# Altium PCB stm32PCB1.PcbDoc
Units mm, origin at the board's own origin, x right, y up, seen from the top; angles counter-clockwise.
Board outline 41.1 x 36.5 mm, 4 copper layers (Top Layer, Int1 (GND), Int2 (PWR), Bottom Layer), stack 1.57 mm thick; 35 components, 27 nets, 168 pads, 29 vias.
Unrouted connection lines stored in the file: 93.
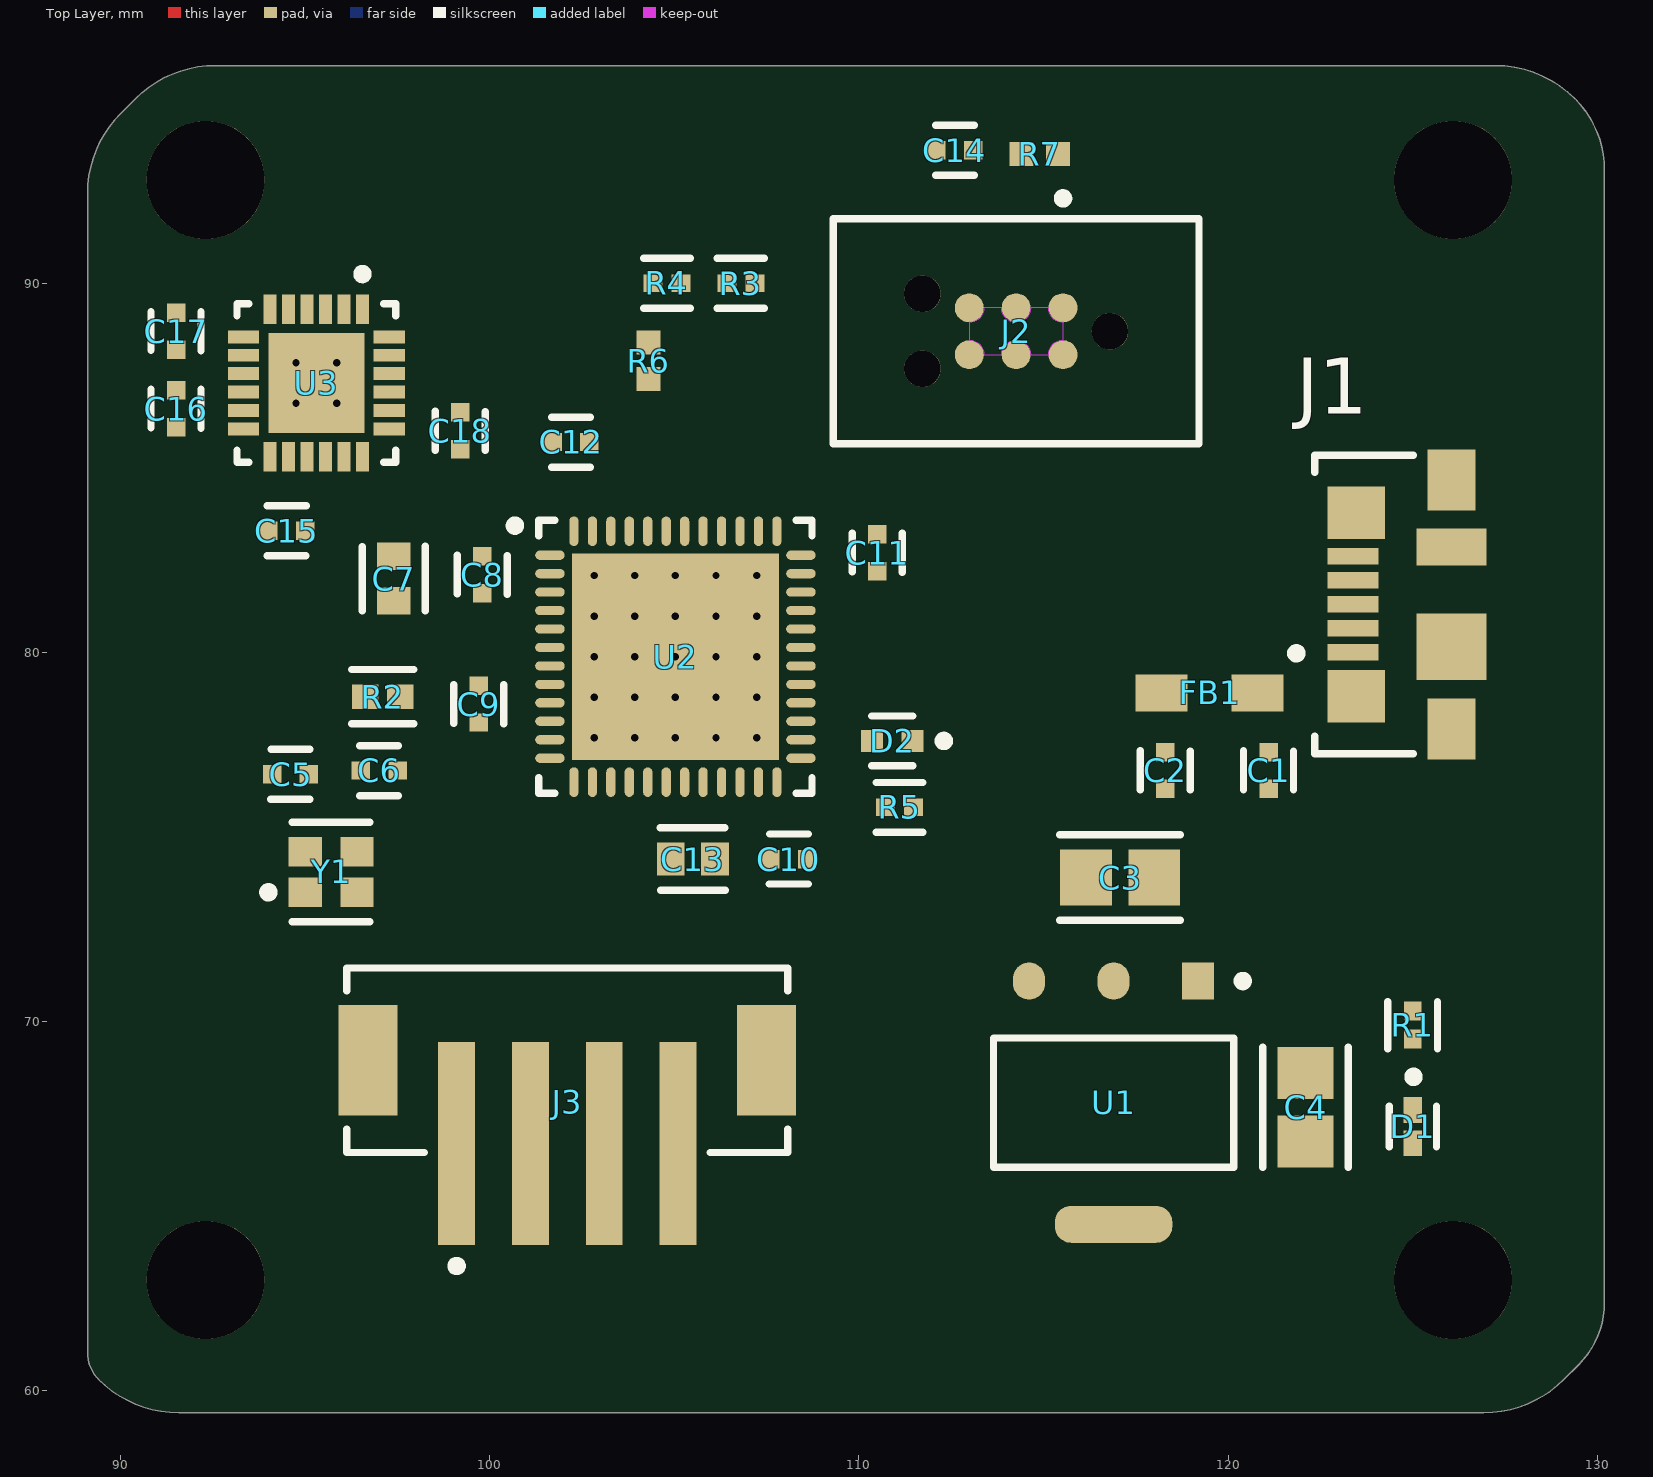
[diagram p0: Top Layer view]
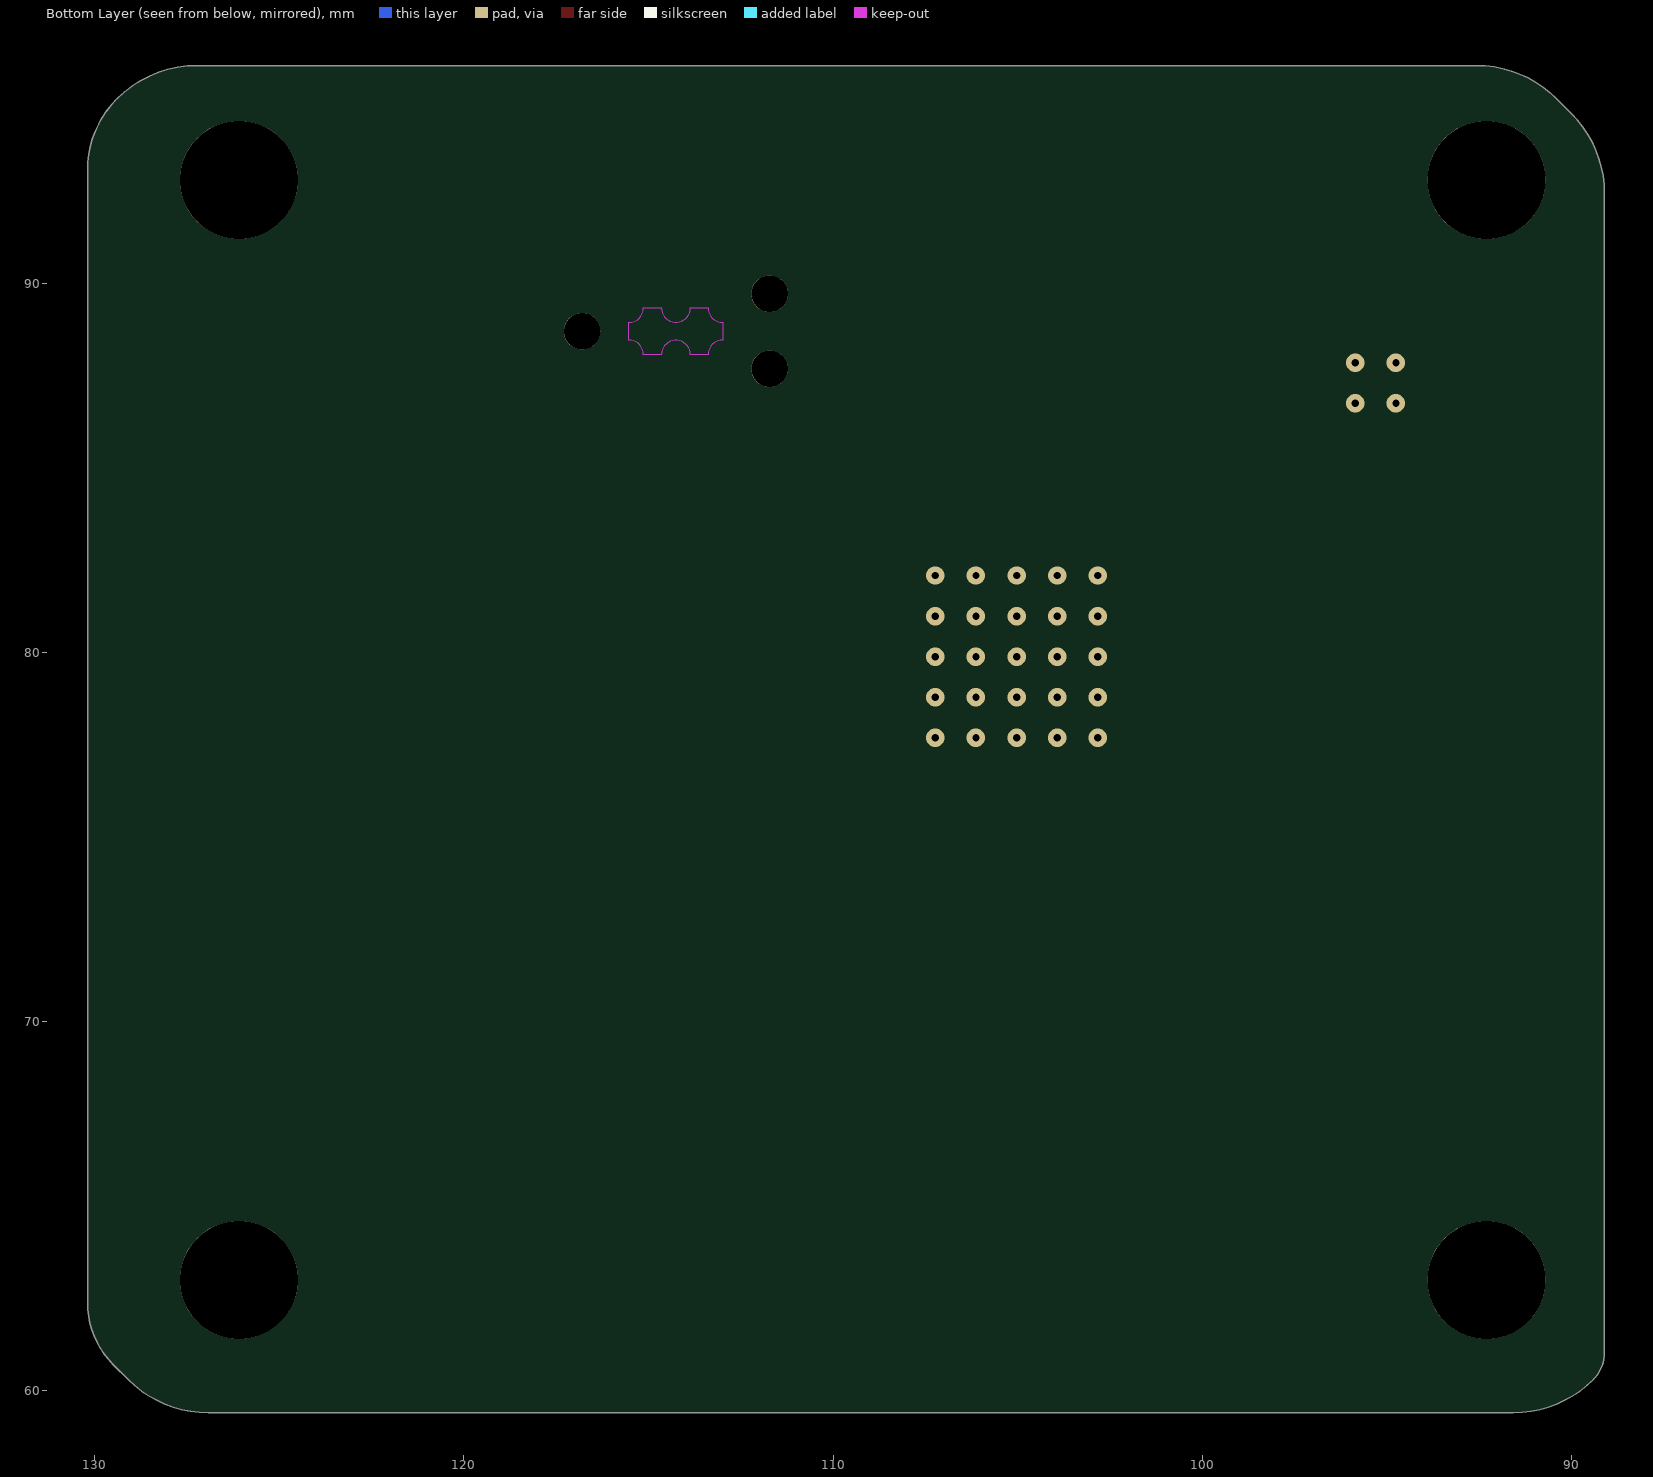
[diagram p1: Bottom Layer view, seen from below]

## Layer stack, top to bottom
Top Solder: solder mask 0.0254, SM-001, Dk 4
Top Layer: signal copper 0.035
Dielectric 1: prepreg 0.2, PP-017, Dk 4.6
Int1 (GND): signal copper 0.0175
Dielectric 3: core 1.065, Core-039, Dk 4.6
Int2 (PWR): signal copper 0.0175
Dielectric 5: prepreg 0.2, PP-017, Dk 4.6
Bottom Layer: signal copper 0.035
Bottom Solder: solder mask 0.0254, SM-001, Dk 4

## Board outline
89.1,61.027 89.1,92.43 cw(c92.166,92.43) 89.998,94.598 90.402,95.002 cw(c92.57,92.834) 92.57,95.9 127.23,95.9 cw(c127.23,92.834) 129.398,95.002 cw(c127.462,93.066) 130.2,93.066 130.2,62.39 cw(c127.81,62.39) 129.5,60.7 129.098,60.298 cw(c126.93,62.466) 126.93,59.4 91.57,59.4 cw(c91.57,62.466) 89.402,60.298 cw(c90.131,61.027)

## Design rules (kind name [scope] priority, off if disabled: settings)
Clearance [All] p1: gap=0.2 ignorepadtopadclearanceinfootprint=FALSE
DiffPairsRouting [All] p1: maxlimit=0.254 minlimit=0.254 mostfreqgap=0.254 toplayer_minwidth=0.381 toplayer_maxwidth=0.381 toplayer_prefwidth=0.381 midlayer1_minwidth=0.381 midlayer1_maxwidth=0.381 midlayer1_prefwidth=0.381 midlayer2_minwidth=0.381 midlayer2_maxwidth=0.381 midlayer2_prefwidth=0.381 bottomlayer_minwidth=0.381 bottomlayer_maxwidth=0.381 bottomlayer_prefwidth=0.381 maxuncoupledlength=12.7
PolygonConnect [All] p1: connectstyle=Direct reliefconductorwidth=0.254 reliefentries=4 polygonreliefangle="90 Angle" airgapwidth=0.254
RoutingVias [All] p1: holewidth=0.711 width=1.27 viastyle="Through Hole" minholewidth=0.711 minwidth=1.27 maxholewidth=0.711 maxwidth=1.27
SolderMaskExpansion [All] p1: expansion=0 istentingtop=FALSE
SupplyNets "Schematic Supply Nets_3" [InNet('VBUS')] p1: voltage=0.000
SupplyNets "Schematic Supply Nets_2" [InNet('+3V3')] p2: voltage=0.000
SupplyNets "Schematic Supply Nets_1" [InNet('GND')] p3: voltage=0.000
SupplyNets "Schematic Supply Nets" [InNet('+5')] p4: voltage=0.000
UnRoutedNet [All] p1: checkbadconnections=TRUE
Width [All] p1: maxlimit=1 minlimit=0.2 preferedwidth=0.254 midlayer1_minwidth=0.254 midlayer1_maxwidth=0.254 midlayer2_minwidth=0.254 midlayer2_maxwidth=0.254 minimp=50.000000 maximp=50.000000 favimp=50.000000
28 further rules are at their usual default settings.

## Classes and differential pairs
differential pair class DIFF_USB: USB_D
differential pair USB_D: +USB_D_P -USB_D_N

## Components (designator, comment, footprint, x,y, rotation, side; value= is the part's Value field where it differs from the comment)
C1 "2u2" FP-CC0402-MFG 121.1,76.8 r270 top value="1 uF"
C2 "2u2" FP-CC0402-MFG 118.3,76.8 r270 top value="1 uF"
C3 "22u" FP-GRM21B-0_15-IPC_A 117.074,73.9 r0 top
C4 "22u" FP-GRM21B-0_15-IPC_A 122.1,67.674 r90 top
C5 "100n" FP-CC0402-MFG 94.6,76.7 r0 top value="1 uF"
C6 "100n" FP-CC0402-MFG 97,76.8 r0 top value="1 uF"
C7 "2.2uF" FP-C0603C-CF-MFG 97.4,82 r270 top value="0.10 μF"
C8 "100n" FP-CC0402-MFG 99.8,82.1 r270 top value="1 uF"
C9 "100n" FP-CC0402-MFG 99.7,78.6 r90 top value="1 uF"
C10 "100n" FP-CC0402-MFG 108.1,74.4 r180 top value="1 uF"
C11 "100n" FP-CC0402-MFG 110.5,82.7 r270 top value="1 uF"
C12 "100n" FP-CC0402-MFG 102.2,85.7 r0 top value="1 uF"
C13 "2.2uF" FP-C0603C-CF-MFG 105.5,74.4 r180 top value="0.10 μF"
C14 "100n" FP-CC0402-MFG 112.6,93.6 r180 top value="1 uF"
C15 "100n" FP-CC0402-MFG 94.5,83.3 r0 top value="1 uF"
C16 "100n" FP-CC0402-MFG 91.5,86.6 r270 top value="1 uF"
C17 "10n" FP-CC0402-MFG 91.5,88.7 r270 top value="1 uF"
C18 "2n2" FP-CC0402-MFG 99.2,86 r270 top value="1 uF"
D1 "LED" FP-APHHS1005CGCK-MFG 125,67.15 r270 top
D2 "Led_red" FP-5988A10107F-MFG 110.9,77.6 r180 top
FB1 "120R" WE-CBA_0805_L2W1.2H0.9_HC 119.5,78.9 r180 top
J1 "473460001" FP-473460001-MFG 125.7,81.3 r90 top
J2 "TC2030-CTX-NL" FP-TC2030-CTX-NL-MFG 114.26,88.7 r180 top
J3 "B4B-PH-SM4-GW-TB(LF)(SN)" FP-B4B-PH-SM4-GW-TB_LF_S-MFG 102.1,68.95 r0 top
R1 "1k" FP-CR0402-IPC_C 125,69.9 r270 top
R2 "0R" FP-CR0402-IPC_A 97.1,78.8 r0 top
R3 "2k2" FP-CR0402-IPC_C 106.8,90 r0 top
R4 "2k2" FP-CR0402-IPC_C 104.8,90 r180 top
R5 "1k" FP-CR0402-IPC_C 111.1,75.8 r0 top
R6 "10k" RESC1005X37X20ML05T10 104.3,87.9 r270 top
R7 "10k" RESC1005X37X20ML05T10 114.9,93.5 r0 top
U1 "AMS1117-3.3" FP-AMS1117-IPC_C 116.9,67.8 r270 top
U2 "STM32F411CEU6" STM-UFQFPN48_L 105.029,79.883 r0 top
U3 "MPU-6050" IS-QFN-24_V 95.3,87.3 r270 top
Y1 "25MHz" FP-ABM11AIG-MFG 95.7,74.05 r0 top

## Footprints (in the part's own frame and the unit in brackets; to place one, negate y for a bottom-side part, rotate by r counter-clockwise, add the part's x,y. Pads: shape width x height; smd on the part's side, far side on the other; paste and mask are expansions set on the pad)
FP-5988A10107F-MFG [mm]
  rect 0.6x0.6 smd paste+0 mask+0: 1(-0.55,0) 2(0.55,0)
  silkscreen extent -1.53,-0.67 0.56,0.67, body extent -0.95,-0.42 0.95,0.42, height 0.25
FP-473460001-MFG [mm]
  rect 0.45x1.38 smd paste+0 mask+0: 1(-1.3,2.31) 2(-0.65,2.31) 3(0,2.31) 4(0.65,2.31) 5(1.3,2.31)
  rect 1.425x1.55 smd paste+0 mask+0: 6(-2.488,2.225) 7(2.488,2.225)
  rect 1.65x1.3 smd paste+0 mask+0: 8(-3.375,-0.35) 11(3.375,-0.35)
  rect 1.8x1.9 smd paste+0 mask+0: 9(-1.15,-0.35)
  rect 1x1.9 smd paste+0 mask+0: 10(1.55,-0.35)
  silkscreen extent -4.05,0.67 4.05,3.97, body extent -4.3,-2.48 4.3,3.45, height 0.25
FP-ABM11AIG-MFG [mm]
  rect 0.9x0.8 smd paste+0 mask+0: 1(-0.7,-0.55) 2(0.7,-0.55) 3(0.7,0.55) 4(-0.7,0.55)
  silkscreen extent -1.82,-1.35 1.05,1.35, body extent -1.25,-1.05 1.25,1.05, height 0.25
FP-AMS1117-IPC_C [mm]
  rect 1.004x0.872 smd paste+0 mask+0: 1(-3.295,2.29)
  rrect100% 1.004x0.872 smd paste+0 mask+0: 2(-3.295,0) 3(-3.295,-2.29)
  rrect87% 1.004x3.182 smd paste+0 mask+0: 4(3.295,0)
  silkscreen extent -3.42,-3.25 1.75,3.63, body extent -3.9,-3.35 3.9,3.35, height 0.25
FP-APHHS1005CGCK-MFG [mm]
  rect 0.7x0.5 smd paste+0 mask+0: 1(-0.45,0) 2(0.45,0)
  silkscreen extent -1.47,-0.63 0.55,0.65, body extent -0.9,-0.4 0.9,0.4, height 0.25
FP-B4B-PH-SM4-GW-TB_LF_S-MFG [mm]
  rect 1x5.5 smd paste+0 mask+0: 1(-3,-2.25) 2(-1,-2.25) 3(1,-2.25) 4(3,-2.25)
  rect 1.6x3 smd paste+0 mask+0: 5(-5.4,0) 6(5.4,0)
  silkscreen extent -5.97,-5.7 5.97,2.5, body extent -6.3,-5.1 6.3,2.6, height 0.25
FP-C0603C-CF-MFG [mm]
  rect 0.75x0.9 smd paste+0 mask+0: 1(-0.6,0) 2(0.6,0)
  silkscreen extent -0.87,-0.85 0.88,0.85, body extent -1.2,-0.6 1.2,0.6, height 0.25
FP-CC0402-MFG [mm]
  rect 0.5x0.5 smd paste+0 mask+0: 1(-0.5,0) 2(0.5,0)
  silkscreen extent -0.53,-0.68 0.53,0.67, body extent -0.87,-0.48 0.87,0.48, height 0.25
FP-CR0402-IPC_A [mm]
  rect 0.715x0.672 smd paste+0 mask+0: 1(-0.479,0) 2(0.479,0)
  silkscreen extent -0.84,-0.74 0.84,0.74, body extent -1.04,-0.54 1.04,0.54, height 0.25
FP-CR0402-IPC_C [mm]
  rect 0.515x0.472 smd paste+0 mask+0: 1(-0.379,0) 2(0.379,0)
  silkscreen extent -0.64,-0.67 0.64,0.67, body extent -0.74,-0.38 0.74,0.38, height 0.25
FP-GRM21B-0_15-IPC_A [mm]
  rect 1.406x1.508 smd paste+0 mask+0: 1(-0.926,0) 2(0.926,0)
  silkscreen extent -1.63,-1.15 1.63,1.15, body extent -2.13,-1.25 2.13,1.25, height 0.25
FP-TC2030-CTX-NL-MFG [mil]
  round 30.98 smd paste-39370.1 mask+0: 1(-50,-25) 2(-50,25) 3(0,-25) 4(0,25) 5(50,-25) 6(50,25)
  round 39.02 hole 39.02 unplated paste-99999 mask+0: ""(-100,0) ""(100,-40) ""(100,40)
  Keep-Out Layer region: -34.51,-25 -15.49,-25 -13.96,-18.28 -9.66,-12.89 -3.45,-9.9 3.45,-9.9 9.66,-12.89 13.96,-18.28 15.49,-25 15.49,-25 34.51,-25 35.69,-19.07 39.05,-14.05 44.07,-10.69 50,-9.51 50,-9.51 50,9.51 44.07,10.69 39.05,14.05 35.69,19.07 34.51,25 34.51,25 15.49,25 13.96,18.28 9.66,12.89 3.45,9.9 -3.45,9.9 -9.66,12.89 -13.96,18.28 -15.49,25 -15.49,25 -34.51,25 -35.69,19.07 -39.05,14.05 -44.07,10.69 -50,9.51 -50,9.51 -50,-9.51 -44.07,-10.69 -39.05,-14.05 -35.69,-19.07 -34.51,-25
  silkscreen extent -195,-147 195,120, body extent -199,-152 199,124, height 59
IS-QFN-24_V [mm] "QFN, 24-Leads, Body 4x4mm, Pitch 0.5mm, Thermal Pad 2.7x2.6mm"
  rect 0.8x0.35 smd: 1(-2,1.25) 2(-2,0.75) 3(-2,0.25) 4(-2,-0.25) 5(-2,-0.75) 6(-2,-1.25) 13(2,-1.25) 14(2,-0.75) 15(2,-0.25) 16(2,0.25) 17(2,0.75) 18(2,1.25)
  rect 0.35x0.85 smd mask+0.102: 7(-1.25,-1.975) 8(-0.75,-1.975) 9(-0.25,-1.975) 10(0.25,-1.975) 11(0.75,-1.975) 12(1.25,-1.975) 19(1.25,1.975) 20(0.75,1.975) 21(0.25,1.975) 22(-0.25,1.975) 23(-0.75,1.975) 24(-1.25,1.975)
  rect 2.7x2.6 smd: 25(0,0)
  silkscreen extent -3.07,-2.15 2.15,2.15, body extent -2,-2 2,2, height 0.95
RESC1005X37X20ML05T10 [mm] "Chip Resistor, 2-Leads, Body 1.00x0.50mm, IPC Low Density"
  rect 0.65x0.65 smd: 1(-0.5,0) 2(0.5,0)
  body extent -0.53,-0.27 0.53,0.28, height 0.37
STM-UFQFPN48_L [mm] "QFN, 48-Leads, Body 7.1x7.1mm, Pitch 0.5mm, Thermal Pad 5.6x5.6mm, IPC High Density"
  oval 0.8x0.25 smd: 1(-3.4,2.75) 2(-3.4,2.25) 3(-3.4,1.75) 4(-3.4,1.25) 5(-3.4,0.75) 6(-3.4,0.25) 7(-3.4,-0.25) 8(-3.4,-0.75) 9(-3.4,-1.25) 10(-3.4,-1.75) 11(-3.4,-2.25) 12(-3.4,-2.75) 25(3.4,-2.75) 26(3.4,-2.25) 27(3.4,-1.75) 28(3.4,-1.25) 29(3.4,-0.75) 30(3.4,-0.25) 31(3.4,0.25) 32(3.4,0.75) 33(3.4,1.25) 34(3.4,1.75) 35(3.4,2.25) 36(3.4,2.75)
  oval 0.25x0.8 smd: 13(-2.75,-3.4) 14(-2.25,-3.4) 15(-1.75,-3.4) 16(-1.25,-3.4) 17(-0.75,-3.4) 18(-0.25,-3.4) 19(0.25,-3.4) 20(0.75,-3.4) 21(1.25,-3.4) 22(1.75,-3.4) 23(2.25,-3.4) 24(2.75,-3.4) 37(2.75,3.4) 38(2.25,3.4) 39(1.75,3.4) 40(1.25,3.4) 41(0.75,3.4) 42(0.25,3.4) 43(-0.25,3.4) 44(-0.75,3.4) 45(-1.25,3.4) 46(-1.75,3.4) 47(-2.25,3.4) 48(-2.75,3.4)
  rect 5.6x5.6 smd: 49(0,0)
  silkscreen extent -4.47,-3.7 3.7,3.7, body extent -3.55,-3.55 3.55,3.55, height 0.6
WE-CBA_0805_L2W1.2H0.9_HC [mm] "SMD EMI Suppression Ferrite Bead, 2-Leads, body 2.00x1.20mm"
  rect 1.4x1 smd: 1(-1.3,0) 2(1.3,0)
  body extent -1,-0.6 1,0.6, height 0.9

## Part data
C1 C2 C5 C6 C8 C9 C10 C11 C12 C14 C15 C16 C17 C18: library part CMP-03422-001191-1, "CAP CER 1UF 16V X5R 0402", Capacitance="1 uF", Manufacturer=YAGEO, Manufacturer Part Number=CC0402KRX5R7BB105, Package=CC0402, Temperature="-55°C to +125°C", Temperature Characteristic=X5R, Temperature Coefficient=30ppm/°C, Temperature Range High=+125°C, Temperature Range Low=-55°C, Tolerance=0.1, Voltage Rating="16 V", Automotive=No, Automotive Grade=NA, Category=Cap, ComponentLink2Description=Datasheet, ComponentLink2URL=http://www.yageo.com/documents/recent/UPY-GP_NP0_16V-to-50V_16.pdf, Device Class L1="Passive Components", Device Class L2=Capacitors, Device Class L3="Ceramic Capacitors", Digikey Description="CAP CER 1UF 16V X5R 0402", Footprint Url=http://www.yageo.com/exep/pages/download/literatures/UPY-C_GEN_24.pdf, Height=0.55mm, Ipc Land Pattern Name=CAPC10050X50, Lead Free=Yes, Material=Ceramic, Mouser Description="0402 1 uF 16 V ±10% Tolerance X5R Multilayer Ceramic Chip Capacitor", Octopart=https://octopart.com/cc0402krx5r7bb105-yageo-25629500, RoHS=TRUE
C3 C4: library part CMP-06035-033280-1, "Chip Multilayer Ceramic Capacitors for General Purpose, 0805, 4.7uF, X6S, 22%, 20%, 35V", Capacitance=4.7uF, Case/Package=0805, Dielectric=X6S, Tolerance=20%, Voltage Rating (DC)=35V, Length=2mm, Thickness=1.25mm, Width=1.25mm
C7 C13: library part CMP-03020-001925-2, "C0603 0.10 μF X7R 30ppm/°C 5.00% 16 V", Capacitance="0.10 μF", Manufacturer=KEMET, Manufacturer Part Number=C0603C104J4RAC, Package=C0603C-CF, Temperature="-55°C to +125°C", Temperature Characteristic=X7R, Temperature Coefficient=30ppm/°C, Temperature Range High=+125°C, Temperature Range Low=-55°C, Tolerance=0.05, Voltage Rating="16 V", Automotive=Yes, Automotive Grade="Grade 1", Category=Cap, ComponentLink2Description=Datasheet, ComponentLink2URL=https://api.kemet.com/component-edge/download/datasheet/C0603C100J5GACAUTO.pdf, Device Class L1="Passive Components", Device Class L2=Capacitors, Device Class L3="Ceramic Capacitors", Height=0.87mm, Lead Free=Yes, Material=Ceramic, Mouser Description="Cap Ceramic 0.1uF 16V X7R 5% Pad SMD 0603 125C Bulk", Octopart=https://octopart.com/c0603c104j4rac-kemet-1309211, RoHS=TRUE
D1: library part CMP-44529-000044-1, "LED GREEN CLEAR CHIP SMD", Case Code (Imperial)=0402, Case Code (Metric)=1005, Color=Green, Forward Current=20mA, Forward Voltage=2.1V, Lens Color=Clear, Max Operating Temperature=85°C, Min Operating Temperature=-40°C, Package Quantity=2000, Case/Package=0402, Dominant Wavelength=570nm, Height=0.6mm, Illumination Color=Green, Lead Free="Lead Free", Length=1mm, Lens Style=Clear, Luminous Intensity=50mcd, Mount="Surface Mount", Number of LEDs=1, Number of Pins=2, Packaging="Tape and Reel", Test Current=20mA, Viewing Angle=120°, Wavelength=570nm, Width=0.5mm
D2: library part CMP-00106-100993512-1, "5988A10107F LED Uni-Color Red 2-Pin Chip 0402(1006Metric) T/R", Case/Package=0402, Color=Red, Forward Current=5mA, Forward Voltage=1.6V, Max Operating Temperature=85°C, Min Operating Temperature=-40°C, Power Dissipation=46mW, Reverse Voltage=5V, Height=533.4µm, Luminous Intensity=65mcd, NexarPartId=100993512, RoHS=Compliant, Schedule B="8541402000, 8541402000", Viewing Angle=140°, Wavelength=635nm
FB1: library part CMP-03913-112295557-2, "Ferrite Bead, 700 Ohm, 1.5A, 0805 Rohs Compliant: Yes", Ambient Temperature Range High=85°C, Ambient Temperature Range Low=-55°C, Current Rating=1.5A, DC Resistance (DCR)=100mΩ, Max Operating Temperature=125°C, Height=900µm, Length=2mm, Min Operating Temperature=-55°C, RoHS=Compliant, Width=1.2mm
J1: library part CMP-2000-05246-2, "CONN RCPT USB2.0 MICRO B SMD R/A", Current Rating=1.8A, Manufacturer=Molex, Package=0, Temperature="-30°C to +85°C", Temperature Range High=+85°C, Temperature Range Low=-30°C, Voltage Rating=30V, Automotive=No, Category=Conn, ComponentLink2Description=Datasheet, ComponentLink2URL=https://www.molex.com/webdocs/datasheets/pdf/en-us/0473460001_IO_CONNECTORS.pdf, Conn Orientation="Right Angle", Contact Material=Gold,Nickel, Device Class L1=Connectors, Device Class L2="USB Connectors", Device Class L3=unset, Digikey Description="CONN RCPT USB2.0 MICRO B SMD R/A", Footprint Url=https://www.molex.com/pdm_docs/sd/473460001_sd.pdf, Height=2.945mm, Is Female=yes, Lead Free=Yes, Manufacturer Part Number=473460001, Number Of Contacts=5, Octopart=https://octopart.com/47346-0001-molex-7164928, Pitch=0.65mm, RoHS=TRUE, Shielding=true, Usb Standard="USB 2.0"
J2: library part CMP-205963-000001-1, "6-Pin “No legs” TC2030 Plug-of-Nails™ Cable for use with ARM Cortex processors"
J3: library part CMP-17439-000485-1, "Connector header SMT, 4 Contacts, 2A, 100V, top entry male pins"
R1 R3 R4 R5: library part CMP-2002-05510-2, "Thick Film Chip Resistors 0402 6.8Ω 0.0625W 5%", Case Code (Imperial)=0402, Case Code (Metric)=1005, Max Operating Temperature=125°C, Max Power Dissipation=63mW, Min Operating Temperature=-55°C, Power Rating=62.5mW, Resistance=6.8R, Temperature Coefficient=500ppm/°C, Tolerance=5%, Voltage Rating=50V, Case/Package=0402, Composition="Thick Film", Contact Plating=Tin, Depth=0.5mm, Height=0.35mm, Length=1mm, Military Standard=Not, Mount="Surface Mount", Packaging="Tape and Reel", Radiation Hardening=No, Termination=SMD/SMT, Thickness=356um, Weight=2.3E-05oz, Width=0.5mm
R2: library part CMP-1011-00610-3, "Thick Film Chip Resistors 0402 7.68kΩ 0.0625W 1% 100ppm/°C", Case Code (Imperial)=0402, Case Code (Metric)=1005, Max Operating Temperature=125°C, Min Operating Temperature=-55°C, Power Rating=62.5mW, Resistance=7.68kR, Temperature Coefficient=100ppm/°C, Tolerance=1%, Voltage Rating=50V, Case/Package=0402, Composition="Thick Film", Contact Plating=Tin, Depth=0.5mm, Height=0.35mm, Length=1mm, Military Standard=Not, Mount="Surface Mount", Packaging="Tape and Reel", Radiation Hardening=No, Termination=SMD/SMT, Thickness=356um, Weight=2.3E-05oz, Width=0.5mm
R6 R7: library part CMP-2002-02538-1, Manufacturer="Vishay BCcomponents", Part Number=MCS04020F2262BE100
U1: library part CMP-209535-000001-1, "LDO Voltage Regulators 1A, 3.3V", Dropout Voltage=1.1V, Manufacturer="Advanced Monolithic Systems", Max Junction Temp=+125°C, Max Power Dissipation=1.2W, Max Supply Voltage=15V, Nominal Supply Current=5mA, Output Current=1A, Output Voltage=3.3V, Package=AMS1117, Temperature="-40°C to +125°C", Temperature Range Low=-40°C, Automotive=No, Category=IC, ComponentLink2Description=Datasheet, ComponentLink2URL=http://www.advanced-monolithic.com/pdf/ds1117.pdf, Device Class L1="Integrated Circuits (ICs)", Device Class L2="Power Management ICs", Device Class L3="Voltage Regulators - Linear", Height=1.8mm, Ipc Land Pattern Name=SOT229P700X180-4, Lead Free=Yes, Manufacturer Part Number=AMS1117-3.3, Number Of Outputs=1, Octopart=https://octopart.com/ams1117-3.3-advanced+monolithic+systems-25899300, Output Type=Fixed, RoHS=TRUE, Standoff Height=0.64mm, Temperature Range High=+125°C
U2: library part CMP-0243-00165-1, "ARM Cortex-M4 32-bit MCU+FPU, 512 KB Flash, 128 KB RAM, 36 I/Os, 48-Pin UFQFPN, -40 to 85 degC, Tray", I/Os (High Current)=36, Operating Frequency(F) (Processor speed) (MHz)=100, Package Description=UFQFPN48, Package Reference="48-Pin Ultra Thin Fine Pitch Quad Flat No-Lead, 7 x 7 x 0.6 mm Body, 0.5 mm Pitch, Exposed Pad", Supply Voltage(Vcc) min (V)=1.7, ComponentLink1Description="Manufacturer URL", ComponentLink1URL=http://www.st.com/, ComponentLink2Description=Datasheet, ComponentLink2URL=http://www.st.com/st-web-ui/static/active/en/resource/technical/document/datasheet/DM00115249.pdf, Core="ARM Cortex-M4", DatasheetVersion="Rev. 6", FLASH Size (Prog) (kB)=512, Internal RAM Size (kB)=128, Mounting Technology="Surface Mount", Packing=Tray
U3: library part CMP-1753-00002-2, "3-Axis Gyroscope, Accelerometer and a Digital Motion Processor(TM) (DMP), 2.375 to 3.46 V, -40 to 85 degC, 24-Pin QFN, RoHS, Tape and Reel", Manufacturer=InvenSense, Standard Package=5,000, Category=Sensors,Transducers, Datasheet URL=http://datasheet.octopart.com/MPU-6050-InvenSense-datasheet-14421344.pdf, Datasheet Version="Rev. 3.3, 05/2012", Dynamic Catalog=MPU-6000™Series, Family=Multifunction, Featured Product=MPU-60506-Axis,IntegratedI²CSolution, Manufacturer URL=http://www.invensense.com/, Online Catalog=MPU-6000™Series, Other Names="1428-1007-2 / MPU6050", Output Type=Digital, Sensor Type=MotionTracking, Unit PriceUSD=Digital
Y1: library part CMP-27762-012485-1, "Crystal 25MHz ±30ppm 10pF SMD-4 2.5mm x 2mm Automotive", Case/Package=SMD/SMT, ESR (Equivalent Series Resistance)=100R, Frequency Stability=50ppm, Frequency Tolerance=30ppm, Load Capacitance=10pF, Max Operating Temperature=105°C, Min Operating Temperature=-40°C, Ratings=AEC-Q200, Frequency=25MHz, Height=0.024inch, Length=0.098inch, Mount="Surface Mount", Packaging="Tape and Reel", RoHS Compliant=Yes, Width=0.079inch

## Free pads (board coordinates)
  round 3.2 hole 3.2: MH1(92.3,63) MH1(92.3,92.8) MH1(126.1,63) MH1(126.1,92.8)

## Via types
v1: diameter 0.5, hole 0.2, Top Layer to Bottom Layer, 29 vias

## Nets (pads, with @x,y where several pads share a name; then routed paths per layer and width w, separated by ;. In a path a pad name is that pad's centre, name@x,y a point inside that pad or via, vN(x,y) a via of type N, cw(c..) or ccw(c..) an arc to the next point about the centre after c; other vN are vias at no path point)
+3V3: C4.1 C7.1 C8.1 C9.1 C10.1 C11.1 C12.1 C15.1 C17.1 D1.2 J2.1 J3.1 R3.2 R4.2 R7.2 U1.2 U1.4 U2.1 U2.9 U2.24 U2.36 U2.48 U3.8 U3.13
+5: C2.1 C3.1 FB1.2 U1.3
GND: C1.2 C2.2 C3.2 C4.2 C5.2 C6.2 C7.2 C8.2 C9.2 C10.2 C11.2 C12.2 C13.2 C14.2 C15.2 C16.2 C17.2 C18.2 J1.5 J2.5 J3.6 R1.1 R5.1 R6.1 U1.1 U2.8 U2.23 U2.35 U2.47 U2.49 U3.1 U3.9 U3.11 U3.18 U3.25 Y1.2 Y1.4
  other v1: 102.829,77.683 103.929,77.683 105.029,77.683 106.129,77.683 107.229,77.683 102.829,78.783 103.929,78.783 105.029,78.783 106.129,78.783 107.229,78.783 102.829,79.883 103.929,79.883 105.029,79.883 106.129,79.883 107.229,79.883 102.829,80.983 103.929,80.983 105.029,80.983 106.129,80.983 107.229,80.983 102.829,82.083 103.929,82.083 105.029,82.083 106.129,82.083 107.229,82.083 94.75,86.75 95.85,86.75 94.75,87.85 95.85,87.85
IMU_CPOUT: C18.1 U3.20
IMU_INT: U2.45 U3.12
IMU_REGOUT: C16.1 U3.10
IMU_SCL: R3.1 U2.42 U3.23
IMU_SDA: R4.1 U2.43 U3.24
LED_PWR_K: D1.1 R1.2
MCU_Boot0: R6.2 U2.44
MCU_LED_A: D2.2 U2.26
MCU_LED_K: D2.1 R5.2
MCU_NRST: C14.1 J2.3 R7.1 U2.7
MCU_OSC_IN: C5.1 U2.5 Y1.1
MCU_OSC_OUT: R2.2 U2.6
MCU_PA4: J3.2 U2.14
MCU_PA5: J3.3 U2.15
MCU_PA6: J3.4 U2.16
MCU_PA7: J3.5 U2.17
MCU_SWCLK: J2.4 U2.37
MCU_SWDIO: J2.2 U2.34
MCU_SWO: J2.6 U2.39
MCU_VCAP1: C13.1 U2.22
USB_D_N: J1.2 U2.32
USB_D_P: J1.3 U2.33
VBUS: C1.1 FB1.1 J1.1
XTAL_IN: C6.1 R2.1 Y1.3
pads on no net: J1.4 J1.6 J1.7 J1.8 J1.9 J1.10 J1.11 J2. U2.2 U2.3 U2.4 U2.10 U2.11 U2.12 U2.13 U2.18 U2.19 U2.20 U2.21 U2.25 U2.27 U2.28 U2.29 U2.30 U2.31 U2.38 U2.40 U2.41 U2.46 U3.2 U3.3 U3.4 U3.5 U3.6 U3.7 U3.14 U3.15 U3.16 U3.17 U3.19 U3.21 U3.22

## Silkscreen, mask and mechanical layers (free items; w line width, h text height)
Mechanical 1:
  lines w0.254: 89.1,61.027 ccw(c90.131,61.027) 89.402,60.298 ccw(c91.57,62.466) 91.57,59.4 126.93,59.4 ccw(c126.93,62.466) 129.098,60.298 129.5,60.7 ccw(c127.81,62.39) 130.2,62.39 130.2,93.066 ccw(c127.462,93.066) 129.398,95.002 ccw(c127.23,92.834) 127.23,95.9 92.57,95.9 ccw(c92.57,92.834) 90.402,95.002 89.998,94.598 ccw(c92.166,92.43) 89.1,92.43 89.1,62.8 89.1,61.027